# Altium PCB RPi.PcbDoc
Units mil, origin at the board's own origin, x right, y up, seen from the top; angles counter-clockwise.
Board outline 6000 x 4000 mil, 2 copper layers (Top Layer, Bottom Layer); 114 components, 99 nets, 684 pads, 0 vias.
Unrouted connection lines stored in the file: 427.
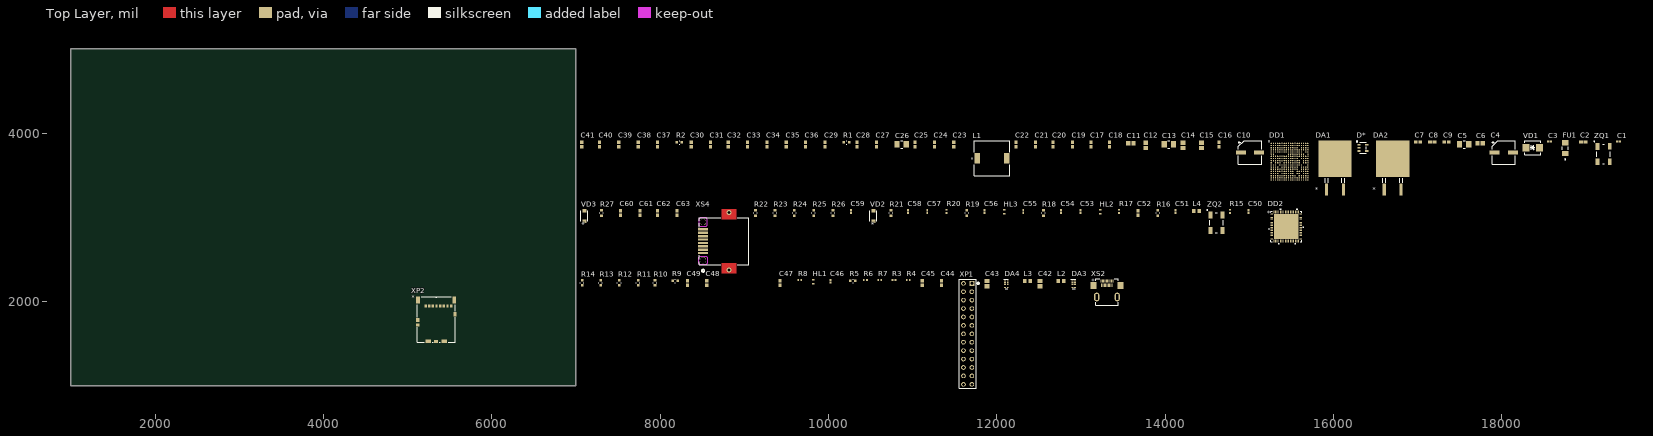
[diagram p0: Top Layer view]
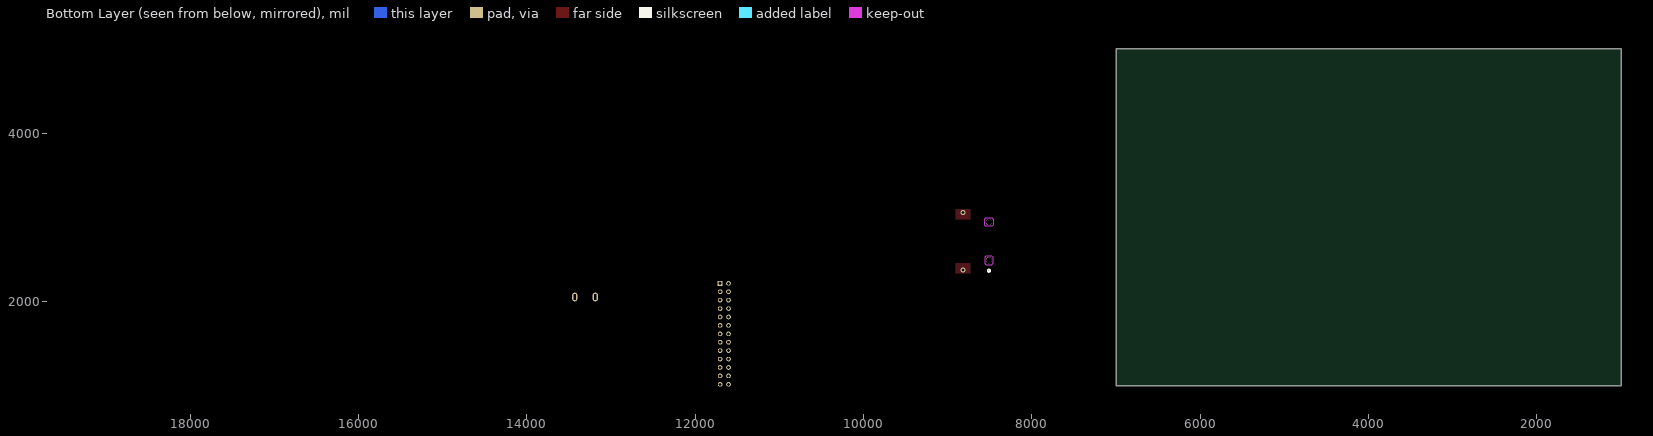
[diagram p1: Bottom Layer view, seen from below]

## Layer stack, top to bottom
Top Solder: solder mask 0.4, Solder Resist, Dk 3.5
Top Layer: signal copper 1.4
Dielectric 1: dielectric 12.6, FR-4, Dk 4.8
Bottom Layer: signal copper 1.4
Bottom Solder: solder mask 0.4, Solder Resist, Dk 3.5

## Board outline
1000,1000 7000,1000 7000,5000 1000,5000

## Design rules (kind name [scope] priority, off if disabled: settings)
Clearance [All] p1: gap=10 ignorepadtopadclearanceinfootprint=FALSE except(0: Arc-Hole Track-Hole SMDPad-Hole THPad-Hole Via-Hole Fill-Hole Poly-Hole Region-Hole Text-Hole)
PolygonConnect [All] p1: connectstyle=Relief reliefconductorwidth=10 reliefentries=4 polygonreliefangle="90 Angle" airgapwidth=10
RoomDefinition Power [InComponentClass('Power')] p1: confinementstyle=ConfineIn formatcopy=TRUE lockcomponents=FALSE outline 7045,3255 19470,3255 19470,4020 7045,4020
RoomDefinition LAN [InComponentClass('LAN')] p2: confinementstyle=ConfineIn formatcopy=TRUE lockcomponents=FALSE outline 7045,2325 15655,2325 15655,3205 7045,3205
RoomDefinition HDMI [InComponentClass('HDMI')] p3: confinementstyle=ConfineIn formatcopy=TRUE lockcomponents=FALSE outline 7045,960 13515,960 13515,2375 7045,2375
RoutingVias [All] p1: holewidth=28 width=50 viastyle="Through Hole" minholewidth=28 minwidth=50 maxholewidth=28 maxwidth=50
SolderMaskExpansion [All] p1: expansion=4 istentingtop=FALSE
Width [All] p1: maxlimit=10 minlimit=10 preferedwidth=10
30 further rules are at their usual default settings.

## Classes and differential pairs
component class Power: C1 C2 C3 C4 C5 C6 C7 C8 C9 C10 C11 C12 C13 C14 C15 C16 C17 C18 C19 C20 C21 C22 C23 C24 C25 C26 C27 C28 C29 C30 C31 C32 C33 C34 C35 C36 C37 C38 C39 C40 C41 D* DA1 DA2 DD1 FU1 L1 R1 R2 VD1 XS1 ZQ1
component class LAN: C50 C51 C52 C53 C54 C55 C56 C57 C58 C59 C60 C61 C62 C63 DD2 HL2 HL3 L4 R15 R16 R17 R18 R19 R20 R21 R22 R23 R24 R25 R26 R27 VD2 VD3 XS3 XS4 XS5 ZQ2
component class HDMI: C42 C43 C44 C45 C46 C47 C48 C49 DA3 DA4 HL1 L2 L3 R3 R4 R5 R6 R7 R8 R9 R10 R11 R12 R13 R14 XP1 XP2 XS2

## Components (designator, comment, footprint, x,y, rotation, side; value= is the part's Value field where it differs from the comment)
C1 "C-0402 * * * * *" C-0402 19390,3900 r0 top
C2 "C-0603 * 100nF * * 100nF" С-0603 18970,3895 r0 top value=100nF
C3 "C-0402 * * * * *" C-0402 18570,3900 r0 top
C4 "C * * * * *" PCAP_SVP_C6_PAN 18025,3770 r0 top
C5 "C-1206 * * * * *" C-1206 17555,3865 r0 top
C6 "C-0805 * * * * *" C-0805-KEM 17745,3880 r0 top
C7 "C-0603 * 1uF * * 100nF" С-0603 17005,3895 r0 top value=1uF
C8 "C-0603 * 100nF * * 100nF" С-0603 17175,3895 r0 top value=100nF
C9 "C-0603 * 100nF * * 100nF" С-0603 17345,3895 r0 top value=100nF
C10 "C * * * * *" PCAP_SVP_C6_PAN 15010,3770 r0 top
C11 "C-0805 * * * * *" C-0805-KEM 13595,3880 r0 top
C12 "C-0805 * * * * *" C-0805-KEM 13770,3855 r90 top
C13 "C-1206 * * * * *" C-1206 14045,3865 r0 top
C14 "C-0805 * * * * *" C-0805-KEM 14215,3855 r90 top
C15 "C-0805 * * * * *" C-0805-KEM 14435,3855 r90 top
C16 "C-0603 * * * * *" С-0603 14640,3865 r90 top
C17 "C-0603 * 100nF * * 100nF" С-0603 13120,3865 r90 top value=100nF
C18 "C-0603 * 1uF * * *" С-0603 13340,3865 r90 top value=1uF
C19 "C-0603 * 100nF * * 100nF" С-0603 12900,3865 r90 top value=100nF
C20 "C-0603 * 1uF * * *" С-0603 12670,3865 r90 top value=1uF
C21 "C-0603 * 100nF * * 100nF" С-0603 12460,3865 r90 top value=100nF
C22 "C-0603 * 100nF * * 100nF" С-0603 12230,3865 r90 top value=100nF
C23 "C-0603 * 1uF * * *" С-0603 11490,3865 r90 top value=1uF
C24 "C-0603 * 100nF * * 100nF" С-0603 11260,3865 r90 top value=100nF
C25 "C-0603 * 1uF * * 100nF" С-0603 11030,3865 r90 top value=1uF
C26 "C-1206 * 10uF * * *" C-1206 10870,3865 r0 top value=10uF
C27 "C-0603 * 1uF * * *" С-0603 10570,3865 r90 top value=1uF
C28 "C-0603 * 220nF * * *" С-0603 10340,3865 r90 top value=220nF
C29 "C-0603 * 100nF * * 100nF" С-0603 9960,3865 r90 top value=100nF
C30 "C-0603 * 220nF * * *" С-0603 8370,3865 r90 top value=220nF
C31 "C-0603 * 220nF * * *" С-0603 8600,3865 r90 top value=220nF
C32 "C-0603 * 220nF * * *" С-0603 8810,3865 r90 top value=220nF
C33 "C-0603 * 220nF * * *" С-0603 9040,3865 r90 top value=220nF
C34 "C-0603 * 220nF * * *" С-0603 9270,3865 r90 top value=220nF
C35 "C-0603 * 220nF * * *" С-0603 9500,3865 r90 top value=220nF
C36 "C-0603 * 220nF * * *" С-0603 9730,3865 r90 top value=220nF
C37 "C-0603 * 1uF * * *" С-0603 7970,3865 r90 top value=1uF
C38 "C-0603 * 220nF * * *" С-0603 7740,3865 r90 top value=220nF
C39 "C-0603 * 220nF * * *" С-0603 7510,3865 r90 top value=220nF
C40 "C-0603 * 220nF * * *" С-0603 7280,3865 r90 top value=220nF
C41 "C-0603 * 220nF * * *" С-0603 7070,3865 r90 top value=220nF
C42 "C-0805 * 100nF * * *" C-0805-KEM 12515,2210 r90 top value=100nF
C43 "C-0805 * 100nF * * *" C-0805-KEM 11885,2210 r90 top value=100nF
C44 "C-0603 * 100nF * * *" С-0603 11345,2220 r90 top value=100nF
C45 "C-0603 * 100nF * * *" С-0603 11115,2220 r90 top value=100nF
C46 "C-0402 * 56pF * * *" C-0402 10025,2240 r90 top value=56pF
C47 "C-0603 * 100nF * * *" С-0603 9425,2220 r90 top value=100nF
C48 "C-0603 * 100nF * * *" С-0603 8555,2220 r90 top value=100nF
C49 "C-0603 * 100nF * * *" С-0603 8325,2220 r90 top value=100nF
C50 "C-0402 * 33pF * * *" C-0402 14990,3070 r90 top value=33pF
C51 "C-0402 * 33pF * * *" C-0402 14125,3070 r90 top value=33pF
C52 "C-0603 * 100pF * * *" С-0603 13680,3050 r90 top value=100pF
C53 "C-0402 * 100nF * * *" C-0402 12995,3070 r90 top value=100nF
C54 "C-0402 * 100nF * * *" C-0402 12765,3070 r90 top value=100nF
C55 "C-0402 * 100nF * * *" C-0402 12315,3070 r90 top value=100nF
C56 "C-0402 * 100nF * * *" C-0402 11855,3070 r90 top value=100nF
C57 "C-0402 * 100nF * * *" C-0402 11175,3070 r90 top value=100nF
C58 "C-0402 * 100nF * * *" C-0402 10945,3070 r90 top value=100nF
C59 "C-0402 * 100nF * * *" C-0402 10270,3070 r90 top value=100nF
C60 "C-0603 * 15pF * * *" С-0603 7530,3050 r90 top value=15pF
C61 "C-0603 * 15pF * * *" С-0603 7760,3050 r90 top value=15pF
C62 "C-0603 * 15pF * * *" С-0603 7970,3050 r90 top value=15pF
C63 "C-0603 * 15pF * * *" С-0603 8200,3050 r90 top value=15pF
D* "LP2980-2.5" MF05A_TEX-L 16350,3825 r0 top
DA1 "NXP1117-3v3" D2PAK3_ONS 16020,3695 r0 top
DA2 "NXP1117-1v8" D2PAK3_ONS 16705,3695 r0 top
DA3 "ESD224 *" DQA0010A 12915,2205 r0 top
DA4 "ESD224 *" DQA0010A 12115,2205 r0 top
DD1 "bcm2835 Broadcom" BGA81C65P18X18_1200X1200X100 15480,3660 r0 top
DD2 "LAN9512" QFN64_9x9MC_MCH 15440,2890 r0 top
FU1 "F-1206 * * * *" FUSE_1206 18755,3820 r90 top
HL1 "LTST-C191KFKT *" LED_DIALIGHT_598_DIA 9820,2235 r90 top
HL2 "LTST-C191KFKT *" LED_DIALIGHT_598_DIA 13230,3065 r90 top
HL3 "LTST-C191KFKT *" LED_DIALIGHT_598_DIA 12090,3065 r90 top
L1 "L-1210" IND_NC_SUM 11945,3700 r0 top
L2 "R-0402 * 100 * *" FB-0805 12765,2245 r0 top value=100
L3 "R-0402 * 100 * *" FB-0805 12365,2245 r0 top value=100
L4 "R-0402 * * * *" FB-0805 14375,3075 r0 top
R1 "R-0603 * 240 * *" R-0603 10215,3890 r0 top value=240
R2 "R-0603 * 100k * *" R-0603 8230,3890 r0 top value=100k
R3 "R-0402 * 1k8 * *" R-0402 10780,2255 r0 top value=1k8
R4 "R-0402 * 1k8 * *" R-0402 10950,2255 r0 top value=1k8
R5 "R-0603 * 1k * *" R-0603 10290,2245 r0 top value=1k
R6 "R-0402 * 1k8 * *" R-0402 10440,2255 r0 top value=1k8
R7 "R-0402 * 1k8 * *" R-0402 10610,2255 r0 top value=1k8
R8 "R-0402 * 8k2 * *" R-0402 9660,2255 r0 top value=8k2
R9 "R-0603 * 33 * *" R-0603 8180,2245 r0 top value=33
R10 "R-0603 * 33 * *" R-0603 7940,2220 r90 top value=33
R11 "R-0603 * 33 * *" R-0603 7740,2220 r90 top value=33
R12 "R-0603 * 33 * *" R-0603 7515,2220 r90 top value=33
R13 "R-0603 * 33 * *" R-0603 7295,2220 r90 top value=33
R14 "R-0603 * 33 * *" R-0603 7075,2220 r90 top value=33
R15 "R-0402 * 12k * *" R-0402 14770,3070 r90 top value=12k
R16 "R-0603 * 3k9 * *" R-0603 13915,3050 r90 top value=3k9
R17 "R-0402 * 10k * *" R-0402 13455,3070 r90 top value=10k
R18 "R-0603 * 1k * *" R-0603 12555,3050 r90 top value=1k
R19 "R-0603 * 1k * *" R-0603 11645,3050 r90 top value=1k
R20 "R-0402 * 10k * *" R-0402 11405,3070 r90 top value=10k
R21 "R-0603 * 3 * *" R-0603 10745,3050 r90 top value=3
R22 "R-0603 * 50 * *" R-0603 9135,3050 r90 top value=50
R23 "R-0603 * 50 * *" R-0603 9365,3050 r90 top value=50
R24 "R-0603 * 50 * *" R-0603 9595,3050 r90 top value=50
R25 "R-0603 * 50 * *" R-0603 9825,3050 r90 top value=50
R26 "R-0603 * 10 * *" R-0603 10055,3050 r90 top value=10
R27 "R-0603 * 3 * *" R-0603 7305,3050 r90 top value=3
VD1 "SMBJ 5V *" SMB_STM 18370,3825 r0 top
VD2 "SS24 *" SS14 10535,3015 r90 top
VD3 "SS24 *" SS14 7100,3015 r90 top
XP1 "PLS-26-2" "26 pin 2.54mm pitch 2 row" 11705,2215 r90 top
XP2 "KLS1-TF" 504077-1891_MOL 5340,1786.95 r0 top
XS2 "Mini HDMI" "mini HDMI" 13310,2110 r0 top
XS4 "RJ-45" CONN8_2041126-1_TEC 8760,2715 r90 top
ZQ1 "TXC19.2 *" CRYSTAL_TXC_7B 19210,3750 r0 top
ZQ2 "TXC19.2 *" CRYSTAL_TXC_7B 14610,2935 r0 top value=25MHz

## Footprints (in the part's own frame and the unit in brackets; to place one, negate y for a bottom-side part, rotate by r counter-clockwise, add the part's x,y. Pads: shape width x height; smd on the part's side, far side on the other; paste and mask are expansions set on the pad)
"26 pin 2.54mm pitch 2 row" [mil]
  rect 60x60 / inner round 60 / far side rect 60x60 hole 38 paste-30 mask+0: 1(0,0)
  round 55 / inner round 60 / far side round 55 hole 35 paste-27.5 mask+0: 2(0,100) 3(-100,0) 4(-100,100) 5(-200,0) 6(-200,100) 7(-300,0) 8(-300,100) 9(-400,0) 10(-400,100) 11(-500,0) 12(-500,100) 13(-600,0) 14(-600,100) 15(-700,0) 16(-700,100) 17(-800,0) 18(-800,100) 19(-900,0) 20(-900,100) 21(-1000,0) 22(-1000,100) 23(-1100,0) 24(-1100,100) 25(-1200,0) 26(-1200,100)
  silkscreen extent -1247,-86 47,151, body extent -1250,-50 50,150, height 224
504077-1891_MOL [mil]
  rect 28x37 smd paste+0 mask+0: 1(-125.98,156.35) 2(-82.68,156.35) 3(-39.37,156.35) 4(3.94,156.35) 5(47.24,156.35) 6(90.55,156.35) 7(133.86,156.35) 8(177.17,156.35)
  rect 41x35 smd paste+0 mask+0: 9(-217.52,-65.5)
  rect 47x85 smd paste-42.5 mask-42.5: 10(-214.76,231.16) 11(214.76,231.16)
  rect 67x41 smd paste-33.5 mask-33.5: 12(-94.49,-259) 13(94.49,-259)
  rect 41x47 smd paste-23.5 mask-23.5: 14(-217.52,-9.98)
  rect 35x49 smd paste-24.5 mask-24.5: 15(220.87,60.29)
  rect 47x35 smd paste-23.5 mask-23.5: 16(0,-261.95)
  silkscreen extent -228,-271 228,271, body extent -306,-359 282,230, height 58
BGA81C65P18X18_1200X1200X100 [mm] "BGA, 81-Leads, Body 12,00x12,00mmx1,00mm, Pitch 0,65mm"
  round 0.4 smd: A1(-5.525,5.525) A2(-4.875,5.525) A3(-4.225,5.525) A4(-3.575,5.525) A5(-2.925,5.525) A6(-2.275,5.525) A7(-1.625,5.525) A8(-0.975,5.525) A9(-0.325,5.525) A10(0.325,5.525) A11(0.975,5.525) A12(1.625,5.525) A13(2.275,5.525) A14(2.925,5.525) A15(3.575,5.525) A16(4.225,5.525) A17(4.875,5.525) A18(5.525,5.525) B1(-5.525,4.875) B2(-4.875,4.875) B3(-4.225,4.875) B4(-3.575,4.875) B5(-2.925,4.875) B6(-2.275,4.875) B7(-1.625,4.875) B8(-0.975,4.875) B9(-0.325,4.875) B10(0.325,4.875) B11(0.975,4.875) B12(1.625,4.875) B13(2.275,4.875) B14(2.925,4.875) B15(3.575,4.875) B16(4.225,4.875) B17(4.875,4.875) B18(5.525,4.875) C1(-5.525,4.225) C2(-4.875,4.225) C3(-4.225,4.225) C4(-3.575,4.225) C5(-2.925,4.225) C6(-2.275,4.225) C7(-1.625,4.225) C8(-0.975,4.225) C9(-0.325,4.225) C10(0.325,4.225) C11(0.975,4.225) C12(1.625,4.225) C13(2.275,4.225) C15(3.575,4.225) C16(4.225,4.225) C17(4.875,4.225) C18(5.525,4.225) D1(-5.525,3.575) D2(-4.875,3.575) D3(-4.225,3.575) D4(-3.575,3.575) D5(-2.925,3.575) D6(-2.275,3.575) D7(-1.625,3.575) D8(-0.975,3.575) D9(-0.325,3.575) D10(0.325,3.575) D11(0.975,3.575) D12(1.625,3.575) D13(2.275,3.575) D14(2.925,3.575) D15(3.575,3.575) D16(4.225,3.575) D17(4.875,3.575) D18(5.525,3.575) E1(-5.525,2.925) E2(-4.875,2.925) E3(-4.225,2.925) E4(-3.575,2.925) E5(-2.925,2.925) E6(-2.275,2.925) E7(-1.625,2.925) E8(-0.975,2.925) E9(-0.325,2.925) E10(0.325,2.925) E11(0.975,2.925) E12(1.625,2.925) E13(2.275,2.925) E14(2.925,2.925) E15(3.575,2.925) E17(4.875,2.925) E18(5.525,2.925) F1(-5.525,2.275) F2(-4.875,2.275) F9(-0.325,2.275) F10(0.325,2.275) F11(0.975,2.275) F12(1.625,2.275) F13(2.275,2.275) F14(2.925,2.275) F15(3.575,2.275) F16(4.225,2.275) F18(5.525,2.275) G1(-5.525,1.625) G2(-4.875,1.625) G3(-4.225,1.625) G4(-3.575,1.625) G5(-2.925,1.625) G6(-2.275,1.625) G7(-1.625,1.625) G8(-0.975,1.625) G9(-0.325,1.625) G10(0.325,1.625) G11(0.975,1.625) G12(1.625,1.625) G13(2.275,1.625) G14(2.925,1.625) G15(3.575,1.625) G16(4.225,1.625) G17(4.875,1.625) G18(5.525,1.625) H1(-5.525,0.975) H2(-4.875,0.975) H3(-4.225,0.975) H4(-3.575,0.975) H5(-2.925,0.975) H6(-2.275,0.975) H7(-1.625,0.975) H8(-0.975,0.975) H9(-0.325,0.975) H10(0.325,0.975) H11(0.975,0.975) H12(1.625,0.975) H13(2.275,0.975) H15(3.575,0.975) H16(4.225,0.975) H17(4.875,0.975) H18(5.525,0.975) J1(-5.525,0.325) J2(-4.875,0.325) J3(-4.225,0.325) J4(-3.575,0.325) J5(-2.925,0.325) J6(-2.275,0.325) J7(-1.625,0.325) J8(-0.975,0.325) J9(-0.325,0.325) J10(0.325,0.325) J11(0.975,0.325) J12(1.625,0.325) J13(2.275,0.325) J14(2.925,0.325) J16(4.225,0.325) J17(4.875,0.325) J18(5.525,0.325) K1(-5.525,-0.325) K3(-4.225,-0.325) K4(-3.575,-0.325) K5(-2.925,-0.325) K7(-1.625,-0.325) K8(-0.975,-0.325) K9(-0.325,-0.325) K10(0.325,-0.325) K11(0.975,-0.325) K12(1.625,-0.325) K13(2.275,-0.325) K14(2.925,-0.325) K16(4.225,-0.325) K17(4.875,-0.325) K18(5.525,-0.325) L1(-5.525,-0.975) L2(-4.875,-0.975) L3(-4.225,-0.975) L5(-2.925,-0.975) L6(-2.275,-0.975) L7(-1.625,-0.975) L8(-0.975,-0.975) L9(-0.325,-0.975) L10(0.325,-0.975) L11(0.975,-0.975) L12(1.625,-0.975) L13(2.275,-0.975) L14(2.925,-0.975) L15(3.575,-0.975) L18(5.525,-0.975) M1(-5.525,-1.625) M2(-4.875,-1.625) M3(-4.225,-1.625) M4(-3.575,-1.625) M6(-2.275,-1.625) M7(-1.625,-1.625) M8(-0.975,-1.625) M9(-0.325,-1.625) M10(0.325,-1.625) M11(0.975,-1.625) M12(1.625,-1.625) M13(2.275,-1.625) M15(3.575,-1.625) M16(4.225,-1.625) M17(4.875,-1.625) M18(5.525,-1.625) N1(-5.525,-2.275) N2(-4.875,-2.275) N3(-4.225,-2.275) N4(-3.575,-2.275) N5(-2.925,-2.275) N6(-2.275,-2.275) N7(-1.625,-2.275) N8(-0.975,-2.275) N9(-0.325,-2.275) N10(0.325,-2.275) N11(0.975,-2.275) N12(1.625,-2.275) N13(2.275,-2.275) N15(3.575,-2.275) N16(4.225,-2.275) N17(4.875,-2.275) N18(5.525,-2.275) P1(-5.525,-2.925) P2(-4.875,-2.925) P3(-4.225,-2.925) P4(-3.575,-2.925) P5(-2.925,-2.925) P6(-2.275,-2.925) P7(-1.625,-2.925) P8(-0.975,-2.925) P9(-0.325,-2.925) P10(0.325,-2.925) P11(0.975,-2.925) P13(2.275,-2.925) P14(2.925,-2.925) P15(3.575,-2.925) P16(4.225,-2.925) P17(4.875,-2.925) P18(5.525,-2.925) R1(-5.525,-3.575) R2(-4.875,-3.575) R3(-4.225,-3.575) R4(-3.575,-3.575) R6(-2.275,-3.575) R7(-1.625,-3.575) R8(-0.975,-3.575) R9(-0.325,-3.575) R10(0.325,-3.575) R11(0.975,-3.575) R13(2.275,-3.575) R14(2.925,-3.575) R16(4.225,-3.575) R17(4.875,-3.575) R18(5.525,-3.575) T1(-5.525,-4.225) T2(-4.875,-4.225) T3(-4.225,-4.225) T4(-3.575,-4.225) T5(-2.925,-4.225) T6(-2.275,-4.225) T7(-1.625,-4.225) T8(-0.975,-4.225) T9(-0.325,-4.225) T10(0.325,-4.225) T11(0.975,-4.225) T12(1.625,-4.225) T14(2.925,-4.225) T15(3.575,-4.225) T16(4.225,-4.225) T17(4.875,-4.225) T18(5.525,-4.225) U1(-5.525,-4.875) U2(-4.875,-4.875) U3(-4.225,-4.875) U4(-3.575,-4.875) U5(-2.925,-4.875) U6(-2.275,-4.875) U7(-1.625,-4.875) U8(-0.975,-4.875) U9(-0.325,-4.875) U10(0.325,-4.875) U11(0.975,-4.875) U12(1.625,-4.875) U13(2.275,-4.875) U14(2.925,-4.875) U15(3.575,-4.875) U16(4.225,-4.875) U17(4.875,-4.875) U18(5.525,-4.875) V1(-5.525,-5.525) V2(-4.875,-5.525) V3(-4.225,-5.525) V4(-3.575,-5.525) V5(-2.925,-5.525) V6(-2.275,-5.525) V7(-1.625,-5.525) V8(-0.975,-5.525) V9(-0.325,-5.525) V10(0.325,-5.525) V11(0.975,-5.525) V12(1.625,-5.525) V13(2.275,-5.525) V14(2.925,-5.525) V15(3.575,-5.525) V16(4.225,-5.525) V17(4.875,-5.525) V18(5.525,-5.525)
  silkscreen extent -6.33,6.09 -6.08,6.33, body extent -6,-6 6,6, height 1
C-0402 [mm]
  rect 0.653x0.55 smd paste+0 mask+0: 1(-0.402,0) 2(0.402,0)
  body extent -0.53,-0.28 0.53,0.28, height 0.55
C-0805-KEM [mm]
  rect 1.3x1.45 smd paste+0 mask+0: 1(-0.8,0) 2(0.8,0)
  body extent -1.1,-0.72 1.1,0.73, height 0.88
C-1206 [mm]
  rect 1.606x1.95 smd paste+0 mask+0: 1(-1.403,0) 2(1.403,0)
  silkscreen extent -0.29,-1.1 0.29,1.1, body extent -1.85,-0.97 1.85,0.97, height 1.95
CONN8_2041126-1_TEC [mil]
  rect 28x118 smd paste+0 mask+0: 1(-140.55,248.16) 2(-100.39,248.16) 3(-60.24,248.16) 4(-20.08,248.16) 5(20.08,248.16) 6(60.24,248.16) 7(100.39,248.16) 8(140.55,248.16)
  round 59 / inner round 60 / far side round 59 hole 39 paste-29.5 mask-29.5: 9(-341.54,-58.93) 10(341.54,-58.93)
  round 71 / inner round 60 / far side round 71 hole 71 unplated paste-35.5 mask-35.5: 11(-226.38,248.16) 12(226.38,248.16)
  Top Layer region: -381.85,-143.43 -381.85,25.57 -261.85,25.57 -261.85,-143.43
  Top Layer region: 261.85,-143.43 261.85,25.57 381.85,25.57 381.85,-143.43
  Keep-Out Layer region: -261.88,197.66 -276.88,212.66 -276.88,283.66 -261.88,298.66 -190.88,298.66 -175.88,283.66 -175.88,212.66 -190.88,197.66
  Keep-Out Layer region: 261.88,197.66 276.88,212.66 276.88,283.66 261.88,298.66 190.88,298.66 175.88,283.66 175.88,212.66 190.88,197.66
  silkscreen extent -365,-294 280,294, body extent -345,-290 345,289, height 338
CRYSTAL_TXC_7B [mil]
  rect 47x79 smd paste-23.5 mask-39.5: 1(-71,91.5) 2(-71,-92.5) 3(74,-92.5) 4(74,92)
  silkscreen extent -113,-116 81,156, body extent -97,-138 100,138, height 51
D2PAK3_ONS [mil]
  rect 36.97x137.56 smd paste+0 mask+0: 1(-100,-365) 3(100,-365)
  rect 395x438 smd paste+0 mask+0: 4(0,0)
  silkscreen extent -118,-282 118,-232, body extent -198,-310 195,216, height 190
DQA0010A [mm]
  rect 0.565x0.2 smd paste+0 mask+0: 1(-0.417,1) 2(-0.417,0.5) 4(-0.417,-0.5) 5(-0.417,-1) 6(0.417,-1) 7(0.417,-0.5) 9(0.417,0.5) 10(0.417,1)
  rect 0.565x0.4 smd paste-0.27 mask+0: 3(-0.417,0) 8(0.417,0)
  silkscreen extent -0.67,-1.45 0.55,1.45, body extent -0.5,-1.24 0.5,1.24, height 0.58
FB-0805 [mm]
  rect 1.006x1.2 smd paste+0 mask+0: 1(-0.853,0) 2(0.853,0)
  body extent -1,-0.58 1,0.62, height 0.9
FUSE_1206 [mil]
  rect 65x80 smd paste-32.5 mask+0: 1(-62.5,0) 2(62.5,0)
  silkscreen extent -136,-38 17,38, body extent -67,-33 67,33, height 20
IND_NC_SUM [mil]
  rect 63x126 smd paste+0 mask+0: 1(-175,0) 2(175,0)
  silkscreen extent -239,-208 212,208, body extent -206,-203 206,203, height 157
LED_DIALIGHT_598_DIA [mil]
  rect 17.5x28 smd paste+0 mask+0: 1(-22.75,0) 2(22.75,0)
  body extent -32,-16 32,16, height 21
MF05A_TEX-L [mil]
  rect 38x20 smd paste+0 mask+0: 1(-46,37.5) 2(-46,0) 3(-46,-37.5) 4(46,-37.5) 5(46,37.5)
  silkscreen extent -78,-64 38,83, body extent -59,-59 59,59, height 48
"mini HDMI" [mil]
  rect 11x35 smd paste+0 mask+0: 1(70.87,130.83) 3(55.12,130.83) 5(39.37,130.83) 7(23.62,130.83) 9(7.87,130.83) 11(-7.87,130.83) 13(-23.62,130.83) 15(-39.37,130.83) 17(-55.12,130.83) 19(-70.87,130.83)
  rect 11x41 smd paste+0 mask+0: 2(62.99,82.6) 4(47.24,82.6) 6(31.5,82.6) 8(15.75,82.6) 10(0,82.6) 12(-15.75,82.6) 14(-31.5,82.6) 16(-47.24,82.6) 18(-62.99,82.6)
  rect 75x80 smd paste+0 mask+0: 20(160,80) 21(-160,80)
  oval 63x104 / inner round 60 / far side oval 63x104 hole 1 paste-52 mask+0: S_1(-122.05,-57.16) S_2(122.05,-57.16)
  round 28 / inner round 60 / far side round 28 hole 28 slot 70 at 90 deg unplated paste-14 mask-14: S_1_H2(-122.05,-57.16) S_2_H1(122.05,-57.16)
  Multi-Layer lines w28: 122.05,-77.66 122.05,-57.16
  silkscreen extent -135,-156 135,156, body extent -175,-150 175,145, height 117
PCAP_SVP_C6_PAN [mil]
  rect 118x48 smd paste+0 mask+0: 1(-108.5,0) 2(108.5,0)
  silkscreen extent -142,-139 139,139, body extent -147,-134 147,134, height 238
QFN64_9x9MC_MCH [mil]
  rect 32x10 smd paste+0 mask+0: 1(-173,147.64) 2(-173,127.95) 3(-173,108.27) 4(-173,88.58) 5(-173,68.9) 6(-173,49.21) 7(-173,29.53) 8(-173,9.84) 9(-173,-9.84) 10(-173,-29.53) 11(-173,-49.21) 12(-173,-68.9) 13(-173,-88.58) 14(-173,-108.27) 15(-173,-127.95) 16(-173,-147.64) 33(173,-147.64) 34(173,-127.95) 35(173,-108.27) 36(173,-88.58) 37(173,-68.9) 38(173,-49.21) 39(173,-29.53) 40(173,-9.84) 41(173,9.84) 42(173,29.53) 43(173,49.21) 44(173,68.9) 45(173,88.58) 46(173,108.27) 47(173,127.95) 48(173,147.64)
  rect 10x32 smd paste+0 mask+0: 17(-147.64,-173) 18(-127.95,-173) 19(-108.27,-173) 20(-88.58,-173) 21(-68.9,-173) 22(-49.21,-173) 23(-29.53,-173) 24(-9.84,-173) 25(9.84,-173) 26(29.53,-173) 27(49.21,-173) 28(68.9,-173) 29(88.58,-173) 30(108.27,-173) 31(127.95,-173) 32(147.64,-173) 49(147.64,173) 50(127.95,173) 51(108.27,173) 52(88.58,173) 53(68.9,173) 54(49.21,173) 55(29.53,173) 56(9.84,173) 57(-9.84,173) 58(-29.53,173) 59(-49.21,173) 60(-68.9,173) 61(-88.58,173) 62(-108.27,173) 63(-127.95,173) 64(-147.64,173)
  rect 295x295 smd paste-147 mask+0: 65(0,0)
  silkscreen extent -209,-209 209,209, body extent -177,-177 177,177, height 39
R-0402 [mil]
  rect 20x22 smd paste-11 mask-11: 1(-18.5,0) 2(18.5,0)
  body extent -21,-11 21,11, height 16
R-0603 [mil]
  rect 30x32 smd paste+0 mask+0: 1(-30.5,0) 2(30.5,0)
  silkscreen extent -3,-21 3,21, body extent -31,-16 31,16, height 28
SMB_STM [mil]
  rect 87x89 smd paste+0 mask+0: 1(-80.5,0) 2(80.5,0)
  silkscreen extent -96,-83 96,83, body extent -110,-78 110,78, height 104
SS14 [mil]
  rect 40.87x47 smd paste+0 mask+0: 1(-62.44,0) 2(62.44,0)
  silkscreen extent -62,-43 62,43, body extent -75,-37 75,37, height 56
С-0603 [mm]
  rect 1.126x0.95 smd paste+0 mask+0: 1(-0.678,0) 2(0.678,0)
  body extent -0.88,-0.48 0.88,0.48, height 0.95

## Part data
C1 C3 C46 C50 C51 C53 C54 C55 C56 C57 C58 C59: library part С-0402, "Generic", Package=C-0402
C2 C7 C8 C9 C17 C19 C21 C22 C24 C25 C29: library part С-0603, "Generic", Manufacturer=100nF, Package=C-0603
C4 C10: library part С, "Generic electrolite SMT capacitor", Package=C
C5 C13 C26: library part С-1206, "Generic", Package=C-1206
C6 C11 C12 C14 C15 C42 C43: library part С-0805, "Generic", Package=C-0805
C16 C18 C20 C23 C27 C28 C30 C31 C32 C33 C34 C35 C36 C37 C38 C39 C40 C41 C44 C45 C47 C48 C49 C52 C60 C61 C62 C63: library part С-0603, "Generic", Package=C-0603
D*: "LDO at output 2.5V"
DA1: "LDO aat output 3.3V"
DA2: "LDO aat output 1.8V"
DA3 DA4: library part ESD224, "bav99 double diode", Name=ESD224
DD1: library part bcm2835, "BCM2835 ARM-based processor", Manufacturer=Broadcom, Name=bcm2835
DD2: "Ethernet + USB Controller", Name=LAN9512
FU1: library part F-1206, "Generic Fuse 1206", Package=F-1206
HL1 HL2 HL3: library part "LED 0603", "Generic LED 0603", Name=LTST-C191KFKT
L1: "Inductor", Name=L-1210
L2 L3 L4: library part "Ferrite Bead 0805", "Generic", Package=R-0402
R1 R2 R5 R9 R10 R11 R12 R13 R14 R16 R18 R19 R21 R22 R23 R24 R25 R26 R27: library part R-0603, "Generic", Package=R-0603
R3 R4 R6 R7 R8 R15 R17 R20: library part R-0402, "Generic", Package=R-0402
VD1: library part "SMBJ 5V", "TVS 5V Diode", Name="SMBJ 5V"
VD2 VD3: library part SS24, "SS24 Shotky", Name=SS24
XP1: "PLS connector 26 pin 2.54mm pitch 2 rows", Name=PLS-26-2
XP2: library part kls1-tf, "Micro-SD card connector SMT mounting", Name=kls1-tf
XS4: "RJ-45 connector SMT mounting", Name=kls1-tf
ZQ1 ZQ2: library part TXC19.2, "TXC19.2 crystal 19.2 MHz", Name=TXC19.2
XS2: Name="Mini HDMI"

## Nets (pads, with @x,y where several pads share a name; then routed paths per layer and width w, separated by ;. In a path a pad name is that pad's centre, name@x,y a point inside that pad or via, vN(x,y) a via of type N, cw(c..) or ccw(c..) an arc to the next point about the centre after c; other vN are vias at no path point)
25MHz_I: C50.1 DD2.61 ZQ2.3
25MHz_O: C51.1 DD2.60 ZQ2.1
+1.8: C2.2 C15.2 C16.2 C17.2 C19.2 C22.2 C24.2 C53.2 C58.2 DD1.A16 DD1.B15 DD1.B16 DD1.K1 DD1.K17 DD1.N13 DD1.P9 DD1.T3 DD1.U17 DD1.V18 DD2.15 DD2.38 L2.1
+2.5: C13.2 C14.2 D*.5 DA2.1
+3.3: C10.1 C12.2 C21.2 C44.2 C45.2 C47.1 C48.1 C49.1 C54.2 C56.2 C57.2 C59.2 D*.1 D*.3 DD1.E4 DD1.E7 DD1.E8 DD1.H4 DD1.K5 DD1.L5 DD1.P13 DD2.5 DD2.10 DD2.11 DD2.19 DD2.27 DD2.28 DD2.33 DD2.40 DD2.46 DD2.49 DD2.51 DD2.54 DD2.57 DD2.64 L3.1 R2.2 R3.2 R4.2 R5.2 R18.1 R19.1 R20.2 R22.1 R23.1 R24.1 R25.1 R26.1 XP1.1 XP1.17 XP2.4
+5: C4.1 C5.2 C6.2 C11.2 C25.1 C29.1 DA1.1 DD1.A13 DD1.A14 DD1.A15 DD1.B13 DD1.B14 FU1.2 R6.2 R7.2 R21.2 R27.2 VD1.2 XP1.2 XP1.4 XS2.18
CMD: R10.2 XP2.3
GND: C1.2 C2.1 C3.2 C4.2 C5.1 C6.1 C7.1 C8.1 C9.1 C10.2 C11.1 C12.1 C13.1 C14.1 C15.1 C16.1 C17.1 C18.1 C19.1 C20.1 C21.1 C22.1 C23.1 C24.1 C25.2 C26.1 C27.1 C28.1 C29.2 C30.1 C31.1 C32.1 C33.1 C34.1 C35.1 C36.1 C37.1 C38.1 C39.1 C40.1 C41.1 C42.2 C43.2 C44.1 C45.1 C46.1 C47.2 C48.2 C49.2 C50.2 C51.2 C52.1 C53.1 C54.1 C55.1 C56.1 C57.1 C58.1 C59.1 C60.2 C61.2 C62.2 C63.2 D*.2 DA1.3 DA2.3 DA3.3 DA3.8 DA4.3 DA4.8 DD1.A1 DD1.A2 DD1.A3 DD1.A11 DD1.A12 DD1.A17 DD1.A18 DD1.B1 DD1.B2 DD1.B11 DD1.B12 DD1.B17 DD1.B18 DD1.C2 DD1.D16 DD1.E3 DD1.E14 DD1.F13 DD1.F14 DD1.F18 DD1.H9 DD1.H10 DD1.H11 DD1.H17 DD1.J2 DD1.J7 DD1.J8 DD1.J9 DD1.J10 DD1.J11 DD1.J12 DD1.J13 DD1.K7 DD1.K8 DD1.K9 DD1.K10 DD1.K11 DD1.K12 DD1.K13 DD1.K14 DD1.K16 DD1.L2 DD1.L7 DD1.L8 DD1.L9 DD1.L10 DD1.L11 DD1.L14 DD1.M8 DD1.M9 DD1.M15 DD1.N1 DD1.N18 DD1.P16 DD1.T14 DD1.T18 DD1.U6 DD1.U18 DD1.V1 DD1.V6 DD1.V17 DD2.34 DD2.44 DD2.65 R1.1 R8.1 R15.2 R16.1 R17.2 VD1.1 XP1.6 XP1.9 XP1.14 XP1.20 XP1.25 XP2.6 XP2.9 XP2.10 XP2.11 XP2.12 XP2.13 XP2.14 XP2.15 XP2.16 XS2.2 XS2.5 XS2.8 XS2.11 XS2.17 XS2.19 XS2.20 XS2.21 XS4.9 XS4.10 ZQ1.2 ZQ1.4 ZQ2.2 ZQ2.4
GPIO_GCLK: DD1.H1 XP1.7
GPIO_GEN0: DD1.E1 XP1.11
GPIO_GEN1: DD1.B4 XP1.12
GPIO_GEN2: DD1.C4 XP1.13
GPIO_GEN3: DD1.B3 XP1.15
GPIO_GEN4: DD1.C5 XP1.16
GPIO_GEN5: DD1.A4 XP1.18
GPIO_GEN6: DD1.A5 XP1.22
HDMI_CEC: C46.2 DD1.N9 XS2.13
HDMI_N_CLK: DA3.7 XS2.12
HDMI_N_TX0: DA3.10 XS2.9
HDMI_N_TX1: DA4.7 XS2.6
HDMI_N_TX2: DA4.10 XS2.3
HDMI_P_CLK: DA3.6 XS2.10
HDMI_P_TX0: DA3.9 XS2.7
HDMI_P_TX1: DA4.6 XS2.4
HDMI_P_TX2: DA4.9 XS2.1
HDMI_SCL_L: DD1.R18 R6.1 XS2.15
HDMI_SDA_L: DD1.R17 R7.1 XS2.16
LAN_RUN: DD1.G1 DD2.12
NetC1_1: C1.1 DD1.R8 ZQ1.3
NetC3_1: C3.1 DD1.R9 ZQ1.1
NetC7_2: C7.2 C8.2 C9.2 DD1.N7 DD1.N8 DD1.P7
NetC18_2: C18.2 C20.2 DD1.D18 DD1.G13 DD1.H13 DD1.J5 DD1.L12
NetC23_2: C23.2 C27.2 C28.2 C36.2 DD1.G15 DD1.H18 DD1.J1 DD1.R3 DD1.T9 DD1.T17
NetC26_2: C26.2 C30.2 C31.2 C32.2 C33.2 C34.2 C35.2 DD1.A7 DD1.A9 DD1.C15 DD1.D3 DD1.E15 DD1.G12 DD1.H5 DD1.H15 DD1.H16 DD1.K4 DD1.L13 DD1.L15 DD1.N4 DD1.N10 DD1.P15 L1.2
NetC37_2: C37.2 C38.2 C39.2 C40.2 C41.2 DD1.A10 DD1.E18 DD1.F15 DD1.G14 DD1.G17 DD1.G18 DD1.J14 DD1.J16 DD1.K3 DD1.P18 DD1.T4 DD1.T12 DD1.T16
NetC42_1: C42.1 DD1.M10 L2.2
NetC43_1: C43.1 DD1.P10 L3.2
NetC52_2: C52.2 DD1.L18 R16.2
NetC55_2: C55.2 DD2.48 L4.2
NetDA3_1: DA3.1 DD1.V7
NetDA3_2: DA3.2 DD1.U7
NetDA3_4: DA3.4 DD1.V8
NetDA3_5: DA3.5 DD1.U8
NetDA4_1: DA4.1 DD1.V9
NetDA4_2: DA4.2 DD1.U9
NetDA4_4: DA4.4 DD1.V10
NetDA4_5: DA4.5 DD1.U10
NetDD1_C12: DD1.C12 DD1.C13 DD1.D12 DD1.D13 L1.1
NetDD1_D15: DD1.D15 R2.1
NetDD1_H12: DD1.H12 R1.2
NetDD1_K18: DD1.K18 R8.2
NetDD1_L1: DD1.L1 R11.1
NetDD1_L3: DD1.L3 R13.1
NetDD1_L6: DD1.L6 R14.1
NetDD1_M3: DD1.M3 R12.1
NetDD1_M7: DD1.M7 R9.1
NetDD1_N2: DD1.N2 R10.1
NetDD2_20: DD2.20 HL2.2
NetDD2_21: DD2.21 HL3.2
NetDD2_41: DD2.41 R20.1
NetDD2_50: DD2.50 R17.1
NetDD2_62: DD2.62 L4.1
NetDD2_63: DD2.63 R15.1
NetFU1_1: FU1.1
NetHL1_1: HL1.1 R5.1
NetHL2_1: HL2.1 R18.2
NetHL3_1: HL3.1 R19.2
NetR21_1: R21.1 VD2.2
NetR26_2: R26.2 XS4.2 XS4.5
NetR27_1: R27.1 VD3.2
RXD0: DD1.E2 XP1.10
RxN: C60.1 DD2.53 R22.2 XS4.6
RxP: C61.1 DD2.52 R23.2 XS4.4
SCL0: DD1.H6 R3.1 XP1.5
SCL1: DD1.J4
SD_CLK: R9.2 XP2.5
SD_DATA0: R11.2 XP2.7
SD_DATA1: R12.2 XP2.8
SD_DATA2: R13.2 XP2.1
SD_DATA3: R14.2 XP2.2
SDA0: DD1.H2 R4.1 XP1.3
SDA1: DD1.J6
SPI_CE0_N: DD1.F1 XP1.24
SPI_CE1_N: DD1.F2 XP1.26
SPI_CLK: DD1.G4 XP1.23
SPI_MISO: DD1.G2 XP1.21
SPI_MOSI: DD1.G3 XP1.19
Status_LED_N: DD1.C1 HL1.2
TXD0: DD1.D4 XP1.8
TxN: C63.1 DD2.56 R25.2 XS4.3
TxP: C62.1 DD2.55 R24.2 XS4.1
USB_DM: DD1.U16 DD2.58
USB_DM2: DD2.1
USB_DM3: DD2.3
USB_DP: DD1.V16 DD2.59
USB_DP2: DD2.2
USB_DP3: DD2.4
USB_VCC1: DD2.14 VD2.1
USB_VCC2: DD2.16 VD3.1
pads on no net: D*.4 DA1.4 DA2.4 DD1.A6 DD1.A8 DD1.B5 DD1.B6 DD1.B7 DD1.B8 DD1.B9 DD1.B10 DD1.C3 DD1.C6 DD1.C7 DD1.C8 DD1.C9 DD1.C10 DD1.C11 DD1.C16 DD1.C17 DD1.C18 DD1.D1 DD1.D2 DD1.D5 DD1.D6 DD1.D7 DD1.D8 DD1.D9 DD1.D10 DD1.D11 DD1.D14 DD1.D17 DD1.E5 DD1.E6 DD1.E9 DD1.E10 DD1.E11 DD1.E12 DD1.E13 DD1.E17 DD1.F9 DD1.F10 DD1.F11 DD1.F12 DD1.F16 DD1.G5 DD1.G6 DD1.G7 DD1.G8 DD1.G9 DD1.G10 DD1.G11 DD1.G16 DD1.H3 DD1.H7 DD1.H8 DD1.J3 DD1.J17 DD1.J18 DD1.M1 DD1.M2 DD1.M4 DD1.M6 DD1.M11 DD1.M12 DD1.M13 DD1.M16 DD1.M17 DD1.M18 DD1.N3 DD1.N5 DD1.N6 DD1.N11 DD1.N12 DD1.N15 DD1.N16 DD1.N17 DD1.P1 DD1.P2 DD1.P3 DD1.P4 DD1.P5 DD1.P6 DD1.P8 DD1.P11 DD1.P14 DD1.P17 DD1.R1 DD1.R2 DD1.R4 DD1.R6 DD1.R7 DD1.R10 DD1.R11 DD1.R13 DD1.R14 DD1.R16 DD1.T1 DD1.T2 DD1.T5 DD1.T6 DD1.T7 DD1.T8 DD1.T10 DD1.T11 DD1.T15 DD1.U1 DD1.U2 DD1.U3 DD1.U4 DD1.U5 DD1.U11 DD1.U12 DD1.U13 DD1.U14 DD1.U15 DD1.V2 DD1.V3 DD1.V4 DD1.V5 DD1.V11 DD1.V12 DD1.V13 DD1.V14 DD1.V15 DD2.6 DD2.7 DD2.8 DD2.9 DD2.13 DD2.17 DD2.18 DD2.22 DD2.23 DD2.24 DD2.25 DD2.26 DD2.29 DD2.30 DD2.31 DD2.32 DD2.35 DD2.36 DD2.37 DD2.39 DD2.42 DD2.43 DD2.45 DD2.47 XS2.14 XS2.S_1 XS2.S_1_H2 XS2.S_2 XS2.S_2_H1 XS4.7 XS4.8 XS4.11 XS4.12

## Text inside footprints (layer, text, board x,y; h text height)
D*: Top Assembly "*" at 16314.5,3842.5 h50
DA1: Top Overlay "*" at 15782.5,3305 h50; Top Assembly "*" at 15907.5,3475 h50
DA2: Top Overlay "*" at 16467.5,3305 h50; Top Assembly "*" at 16592.5,3475 h50
DD2: Top Overlay "*" at 15213.5,3022.48 h50; Top Assembly "*" at 15270.5,3022.48 h50
VD2: Top Overlay "*" at 10560,2904.63 h50 r90; Top Assembly "*" at 10560,2955.5 h50 r90
VD3: Top Overlay "*" at 7125,2904.63 h50 r90; Top Assembly "*" at 7125,2955.5 h50 r90
XP2: Top Overlay "*" at 5050,2021.95 h50
XS2: Top Overlay "*" at 13126.63,2215.83 h50; Mechanical 13 "*" at 13126.63,2215.83 h50